# EAGLE board PCB (EAGLE 9.7.0)
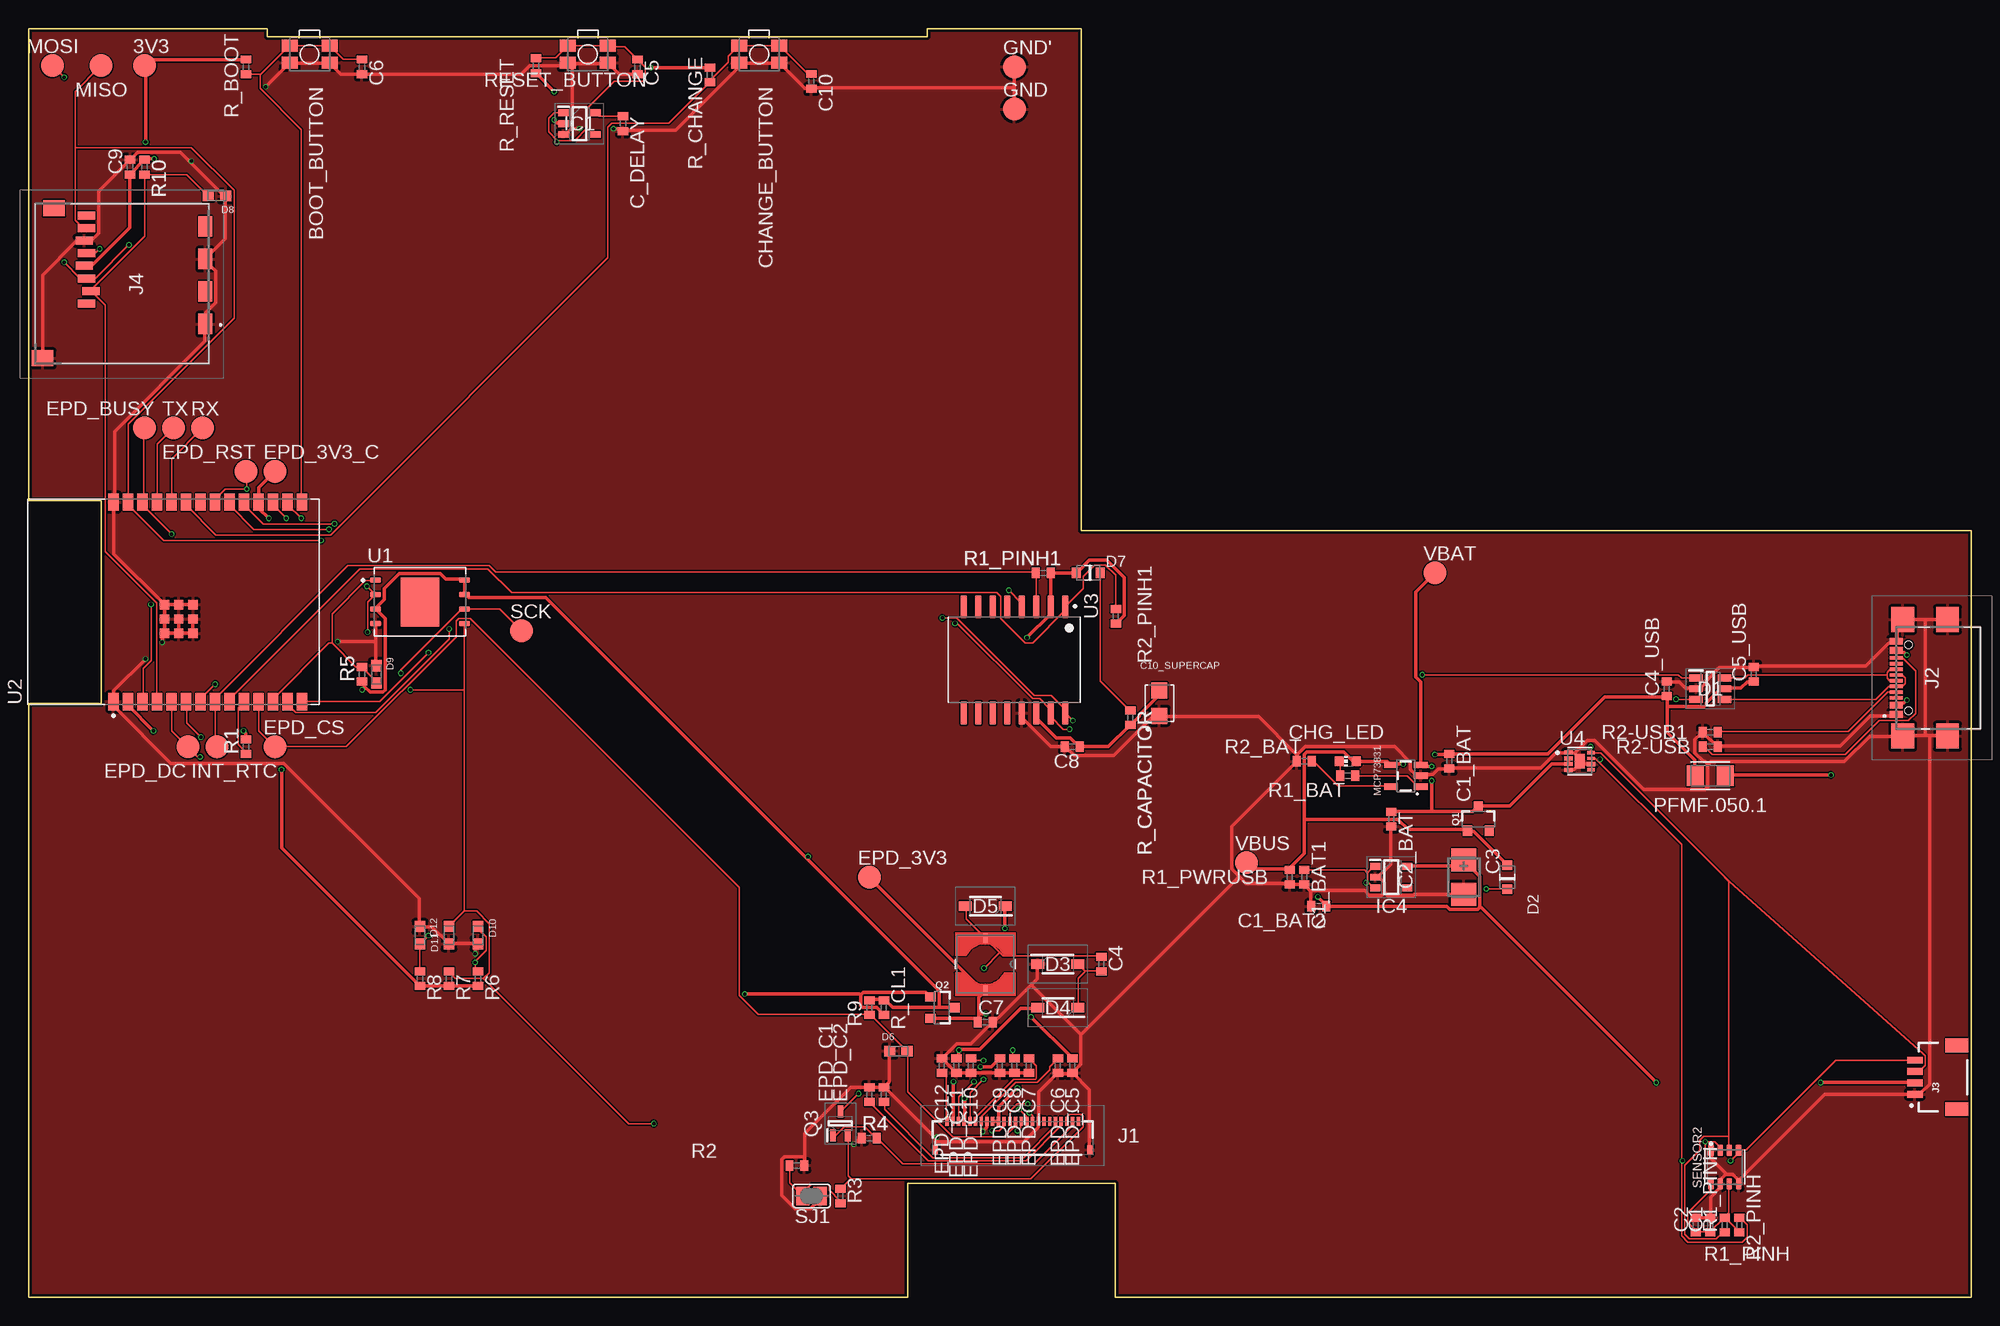
[diagram p0: board, top side]
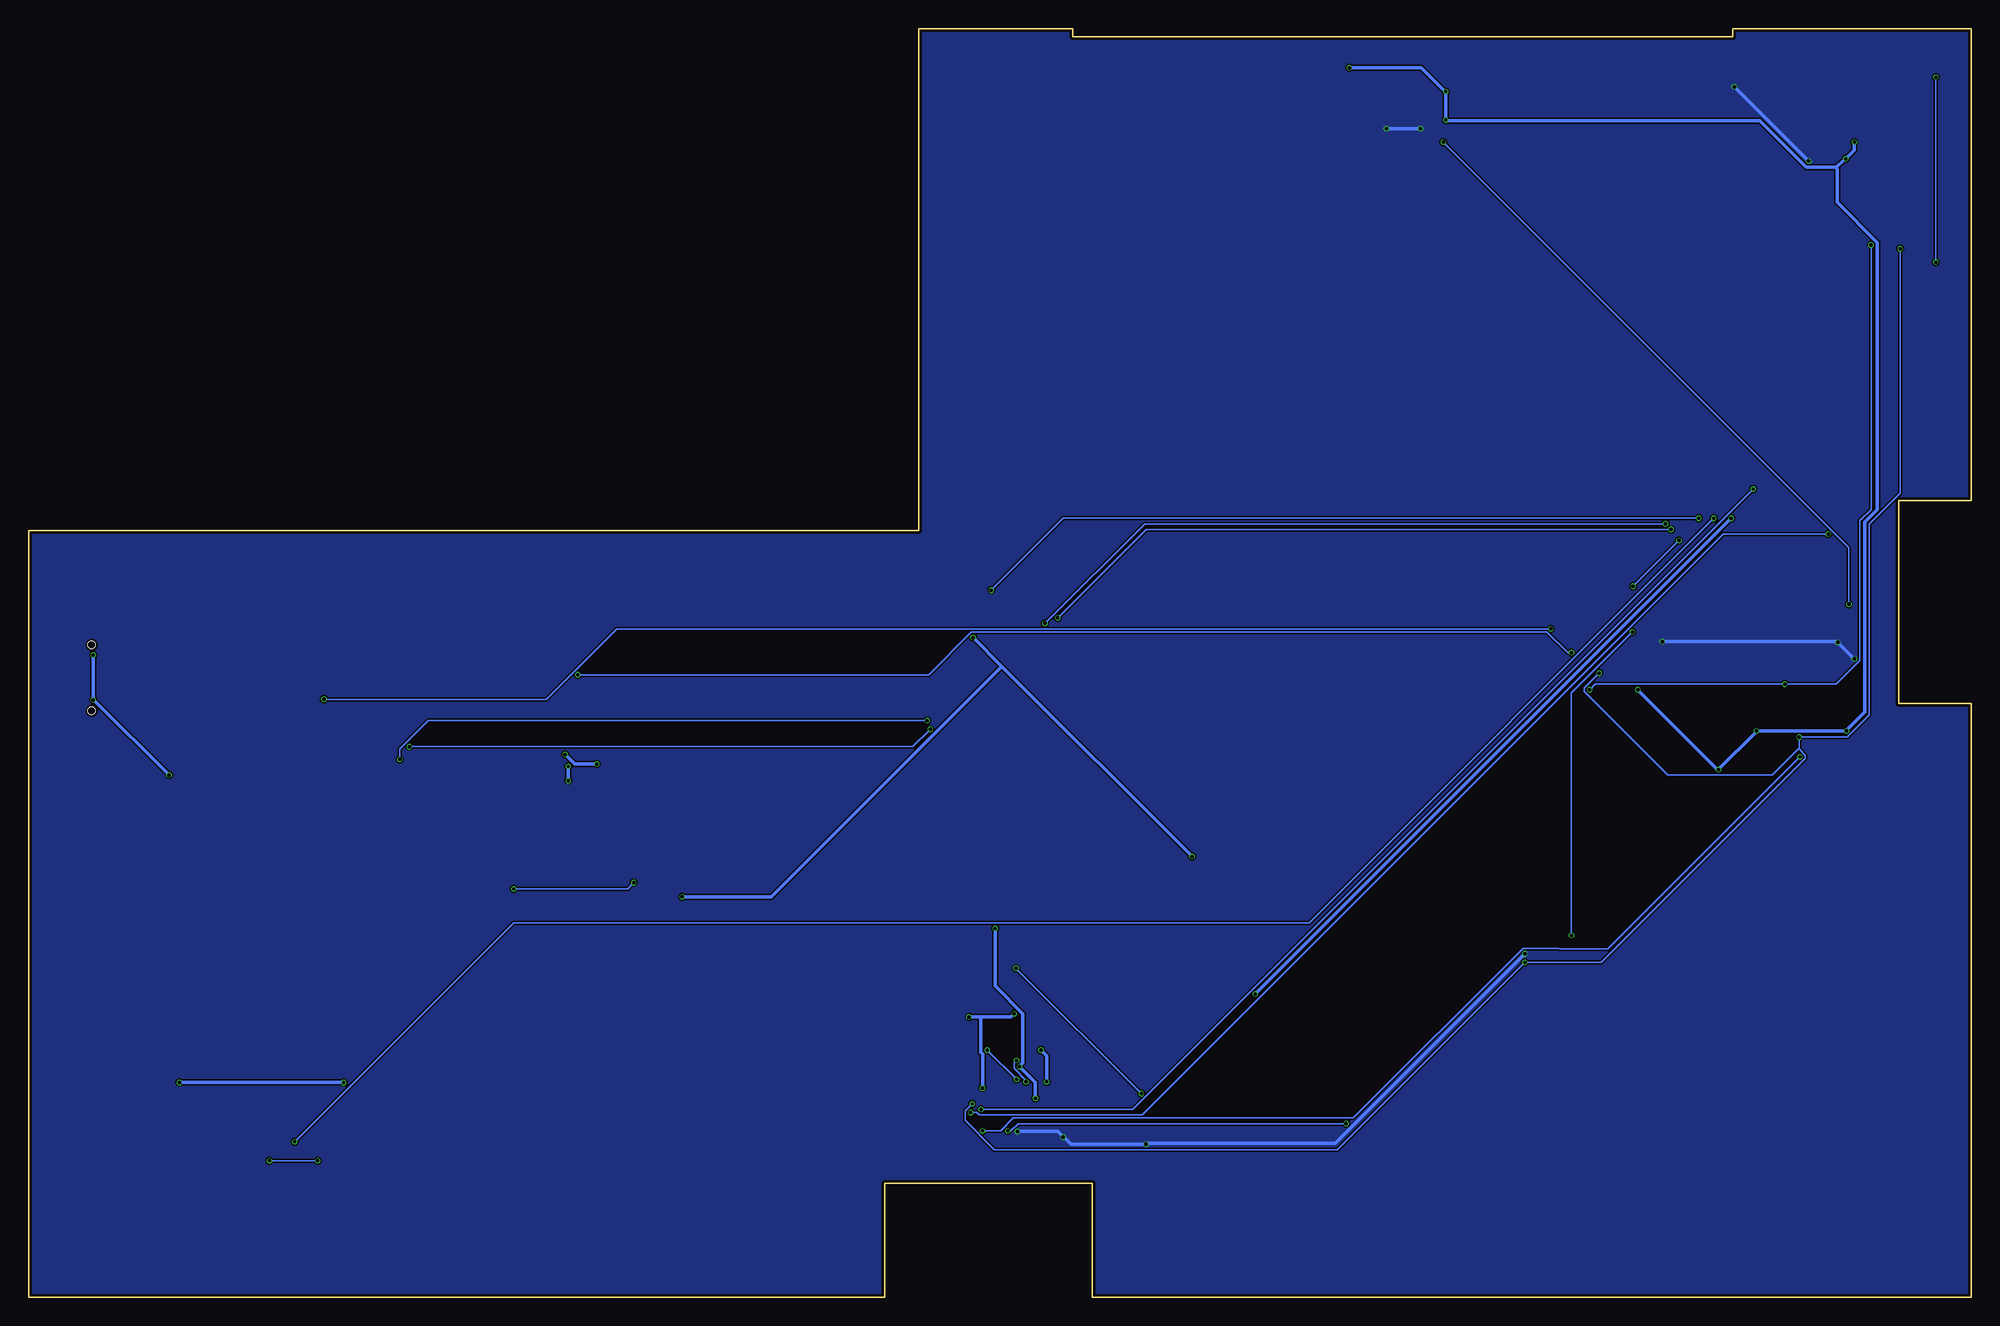
[diagram p1: board, bottom side, seen from below]

Size 170.2 x 111.2 mm. Coordinates in mm from the lower left corner, seen from the top.
Outline: 0,111.2 20.91,111.2 20.91,110.49 78.74,110.49 78.74,111.2 92.2,111.2 92.2,67.2 170.2,67.2 170.2,0 95.2,0 95.2,10 77,10 77,0 0,0 0,52.07 6.35,52.07 6.35,69.85 0,69.85 0,111.2
Copper layers (1*16): Top 0.035mm / dielectric 1.6mm / Bottom 0.035mm
Design rules "jlcpcb-2layers": minimum track width 0.15mm, minimum drill 0.3mm, track to track 5mil, track to pad 5mil, pad to pad 5mil, via to via 5mil, smd to smd 5mil, copper to edge 0.2mm, drill to drill 6mil, minimum pad ring 10mil, minimum via ring 3mil, stop-mask expansion 4mil, vias tented up to drill 0mil, thermal gap 10mil
Net classes: 1 POWER: width 0.3 mm

## Footprints (pad centres in the part's own frame; a part is rotated, then mirrored left to right if it is on the bottom)
TP20R = smd 2 x 2: TP 0,0
MYBUTTON = smd 1.4 x 1.05: 1 1.75,0.75; 2 -1.75,0.75; 3 -1.75,-0.75; 4 1.75,-0.75
EAGLE-LTSPICE_C0402 = smd 0.7 x 0.9: 1 -0.65,0; 2 0.65,0
RCL_CT3528 = smd 2 x 2.2: + -1.5,0; - 1.5,0
CAPCP3225X100N = smd 1.4 x 1.4: 1 -1.1,0; 2 1.1,0
ADAFRUIT_CHIP-LED0603 = smd 0.8 x 0.8: A 0,-0.75; C 0,0.75
SOT95P280X145-6N = smd 1.2 x 0.6: 1 -1.25,0.95; 2 -1.25,0; 3 -1.25,-0.95; 4 1.25,-0.95; 5 1.25,0; 6 1.25,0.95
ESP32_WROVER_AVX---SD0805S020S1R0_AVX_SD0805S020S1R0_0 = smd 0.8 x 0.9: 1 -1.05,0; 2 1.05,0
SOD3716X135N = smd 1.15 x 0.8: 1 -1.75,0; 2 1.75,0
DIOC1608X36N = smd 0.97 x 0.94: 1 -0.75,0; 2 0.75,0
SOT95P280X125-5N = smd 0.9 x 0.6: 1 -1.4,0.95; 2 -1.4,0; 3 -1.4,-0.95; 4 1.4,-0.95; 5 1.4,0.95
SOT95P280X120-5N = smd 0.9 x 0.6: 1 -1.4,0.95; 2 -1.4,0; 3 -1.4,-0.95; 4 1.4,-0.95; 5 1.4,0.95
FH34SRJ24S05SH99 = smd 0.3 x 0.8: 1 5.75,1.45; 2 5.25,1.45; 3 4.75,1.45; 4 4.25,1.45; 5 3.75,1.45; 6 3.25,1.45; 7 2.75,1.45; 8 2.25,1.45; 9 1.75,1.45; 10 1.25,1.45; 11 0.75,1.45; 12 0.25,1.45; 13 -0.25,1.45; 14 -0.75,1.45; 15 -1.25,1.45; 16 -1.75,1.45; 17 -2.25,1.45; 18 -2.75,1.45; 19 -3.25,1.45; 20 -3.75,1.45; 21 -4.25,1.45; 22 -4.75,1.45; 23 -5.25,1.45; 24 -5.75,1.45 | smd 0.4 x 0.8: MP1 6.75,-1.05; MP2 -6.75,-1.05
SAMACSYS_PARTS_USB4110GFA = smd 0.3 x 1.15: A1 -3.35,3.678; A4 -2.55,3.678; A5 -1.25,3.678; A6 -0.25,3.678; A7 0.25,3.678; A8 1.25,3.678; A9 2.55,3.678; A12 3.35,3.678; B1 3.05,3.678; B4 2.25,3.678; B5 1.75,3.678; B6 0.75,3.678; B7 -0.75,3.678; B8 -1.75,3.678; B9 -2.25,3.678; B12 -3.05,3.678 | smd 2.18 x 2: MP1 -5.11,-0.827; MP2 5.11,-0.827; MP3 -5.11,3.103; MP4 5.11,3.103 | hole 0.65: -2.89,2.603; 2.89,2.603
JST04_1MM_RA = smd 0.6 x 1.35: 1 -1.5,0; 2 -0.5,0; 3 0.5,0; 4 1.5,0 | smd 1.2 x 2: NC1 2.8,-3.675; NC2 -2.8,-3.675
112ATAARR03ATTEND = smd 1.8 x 1.2: G1 10.6,10.4; G2 4.9,10.4; S1 7.75,10.4; S2 2.05,10.4 | smd 1.4 x 1.9: G3 13.6,-3.85; G4 0.45,-2.85 | smd 0.7 x 1.5: P1 8.8,0; P2 7.7,0.4; P3 6.6,0; P4 5.5,-0.2; P5 4.4,0; P6 3.3,-0.2; P7 2.2,0; P8 1.1,0
IND_4828-WE-TPC_WRE = smd 0.813 x 0.406: 1 -2.286,0; 2 2.286,0
ESP32_WROVER_SPARKFUN-IC-POWER_SOT23-5 = smd 0.55 x 1.2: 1 -0.95,-1.3; 2 0,-1.3; 3 0.95,-1.3; 4 0.95,1.3; 5 -0.95,1.3
VARC3216X102N = smd 1.505 x 1.815: 1 -1.305,0; 2 1.305,0
ESP32_WROVER_SPARKFUN-DISCRETESEMI_SOT23-3 = smd 0.8 x 0.9: 1 -0.95,-1; 2 0.95,-1; 3 0,1.1
SOT65P210X110-3N = smd 1.05 x 0.5: 1 -1.05,0.65; 2 -1.05,-0.65; 3 1.05,0
ESP32_WROVER_EAGLE-LTSPICE_R0402 = smd 0.7 x 0.9: 1 -0.65,0; 2 0.65,0
ESP32_WROVER_BME680_PSON80P300X300X100-8N = smd 1.016 x 0.5: 1 1.458,1.2; 2 1.458,0.4; 3 1.458,-0.4; 4 1.458,-1.2; 5 -1.458,-1.22; 6 -1.458,-0.4; 7 -1.458,0.4; 8 -1.458,1.2
SJ = smd 1.168 x 1.6: 1 -0.762,0; 2 0.762,0
SON127P600X800X80-9N = smd 0.94 x 0.44: 1 -3.895,1.905; 2 -3.895,0.635; 3 -3.895,-0.635; 4 -3.895,-1.905; 5 3.895,-1.905; 6 3.895,-0.635; 7 3.895,0.635; 8 3.895,1.905 | smd 3.4 x 4.3: 9 0,0
XCVR_ESP32-C6-WROOM-1-N8 = smd 1.5 x 0.9: 1 -8.75,5.26; 2 -8.75,3.99; 3 -8.75,2.72; 4 -8.75,1.45; 5 -8.75,0.18; 6 -8.75,-1.09; 7 -8.75,-2.36; 8 -8.75,-3.63; 9 -8.75,-4.9; 10 -8.75,-6.17; 11 -8.75,-7.44; 12 -8.75,-8.71; 13 -8.75,-9.98; 14 -8.75,-11.25; 15 8.75,-11.25; 16 8.75,-9.98; 17 8.75,-8.71; 18 8.75,-7.44; 19 8.75,-6.17; 20 8.75,-4.9; 21 8.75,-3.63; 22 8.75,-2.36; 23 8.75,-1.09; 24 8.75,0.18; 25 8.75,1.45; 26 8.75,2.72; 27 8.75,3.99; 28 8.75,5.26 | smd 0.8 x 0.8: 29_1 -2.755,0.79; 29_2 -1.505,0.79; 29_3 -0.255,0.79; 29_4 -2.755,-0.46; 29_5 -1.505,-0.46; 29_6 -0.255,-0.46; 29_7 -2.755,-1.71; 29_8 -1.505,-1.71; 29_9 -0.255,-1.71
SOIC127P1032X265-16N = smd 2.05 x 0.59: 1 -4.655,4.445; 2 -4.655,3.175; 3 -4.655,1.905; 4 -4.655,0.635; 5 -4.655,-0.635; 6 -4.655,-1.905; 7 -4.655,-3.175; 8 -4.655,-4.445; 9 4.655,-4.445; 10 4.655,-3.175; 11 4.655,-1.905; 12 4.655,-0.635; 13 4.655,0.635; 14 4.655,1.905; 15 4.655,3.175; 16 4.655,4.445
SON50P200X200X80-9N = smd 0.813 x 0.356: 1 -0.985,0.75; 2 -0.985,0.25; 3 -0.985,-0.25; 4 -0.985,-0.75 | smd 0.76 x 0.27: 5 0.985,-0.75; 7 0.985,0.25; 8 0.985,0.75 | smd 0.813 x 0.381: 6 0.985,-0.25 | smd 0.9 x 1.3: 9 0,0

## Placement (x,y rotation side)
3V3  TPTP20R  [TP20R]  10.16,107.95 0 top
BOOT_BUTTON  BUTTON_CUSYOMV1PACKAGE  [MYBUTTON]  24.62,108.94 180 top
C1  100nF  [EAGLE-LTSPICE_C0402]  147.32,6.35 90 top
C1_BAT  4.7uF  [EAGLE-LTSPICE_C0402]  124.46,46.99 270 top
C1_BAT1  4.7uF  [EAGLE-LTSPICE_C0402]  111.76,36.83 270 top
C1_BAT2  4.7uF  [EAGLE-LTSPICE_C0402]  113.03,34.29 180 top
C2  100nF  [EAGLE-LTSPICE_C0402]  146.05,6.35 90 top
C2_BAT  4.7uF  [EAGLE-LTSPICE_C0402]  119.38,41.91 270 top
C3  100uF  [RCL_CT3528]  125.73,36.83 270 top
C4  4.7uF/25V  [EAGLE-LTSPICE_C0402]  93.98,29.21 90 top
C4_USB  100 nF  [EAGLE-LTSPICE_C0402]  143.51,53.34 90 top
C5  1uF  [EAGLE-LTSPICE_C0402]  53.34,107.84 270 top
C5_USB  4.7 uF  [EAGLE-LTSPICE_C0402]  151.13,54.61 90 top
C6  100nF  [EAGLE-LTSPICE_C0402]  29.21,107.84 270 top
C7  10uF  [EAGLE-LTSPICE_C0402]  83.82,24.13 0 top
C8  100nF  [EAGLE-LTSPICE_C0402]  91.44,48.26 180 top
C9  100nF  [EAGLE-LTSPICE_C0402]  8.89,99.06 90 top
C10  100nF  [EAGLE-LTSPICE_C0402]  68.58,106.57 270 top
C10_SUPERCAP  CPH3225A  [CAPCP3225X100N]  99.06,52.07 90 top
C_DELAY  100nF  [EAGLE-LTSPICE_C0402]  52.07,102.87 270 top
CHANGE_BUTTON  BUTTON_CUSYOMV1PACKAGE  [MYBUTTON]  64,108.94 180 top
CHG_LED  [ADAFRUIT_CHIP-LED0603]  115.57,46.99 90 top
D1  USBLC6-2SC6Y  [SOT95P280X145-6N]  147.32,53.34 0 top
D2  ESP32_WROVER_AVX---SD0805S020S1R0_AVX_SD0805S020S1R0_0_0AVX_SD0805S020S1R0_0_0  [ESP32_WROVER_AVX---SD0805S020S1R0_AVX_SD0805S020S1R0_0]  129.54,36.83 90 top
D3  MBR0530  [SOD3716X135N]  90.17,29.21 0 top
D4  MBR0530  [SOD3716X135N]  90.17,25.4 180 top
D5  MBR0530  [SOD3716X135N]  83.82,34.29 180 top
D6  PGB1010603MR  [DIOC1608X36N]  76.2,21.59 0 top
D7  ESP32_WROVER_AVX---SD0805S020S1R0_AVX_SD0805S020S1R0_0_0AVX_SD0805S020S1R0_0_0  [ESP32_WROVER_AVX---SD0805S020S1R0_AVX_SD0805S020S1R0_0]  92.82,63.5 180 top
D8  PGB1010603MR  [DIOC1608X36N]  16.51,96.52 180 top
D9  PGB1010603MR  [DIOC1608X36N]  30.48,54.61 270 top
D10  PGB1010603MR  [DIOC1608X36N]  39.37,31.75 90 top
D11  PGB1010603MR  [DIOC1608X36N]  36.83,31.75 90 top
D12  PGB1010603MR  [DIOC1608X36N]  34.29,31.75 270 top
EPD_3V3  TPTP20R  [TP20R]  73.66,36.83 0 top
EPD_3V3_C  TPTP20R  [TP20R]  21.59,72.39 0 top
EPD_BUSY  TPTP20R  [TP20R]  10.16,76.2 0 top
EPD_C1  1uF/50V  [EAGLE-LTSPICE_C0402]  73.66,17.78 90 top
EPD_C2  1uF/50V  [EAGLE-LTSPICE_C0402]  74.93,17.78 90 top
EPD_C5  0.1uF/50V  [EAGLE-LTSPICE_C0402]  91.44,20.32 270 top
EPD_C6  1uF/50V  [EAGLE-LTSPICE_C0402]  90.17,20.32 270 top
EPD_C7  1uf/50V  [EAGLE-LTSPICE_C0402]  87.63,20.32 270 top
EPD_C8  1uF/50V  [EAGLE-LTSPICE_C0402]  86.36,20.32 270 top
EPD_C9  1uF/50V  [EAGLE-LTSPICE_C0402]  85.09,20.32 270 top
EPD_C10  1uF/50V  [EAGLE-LTSPICE_C0402]  82.55,20.32 270 top
EPD_C11  1uF/50V  [EAGLE-LTSPICE_C0402]  81.28,20.32 270 top
EPD_C12  1uF/50V  [EAGLE-LTSPICE_C0402]  80.01,20.32 90 top
EPD_CS  TPTP20R  [TP20R]  21.59,48.26 0 top
EPD_DC  TPTP20R  [TP20R]  13.97,48.26 0 top
EPD_RST  TPTP20R  [TP20R]  19.05,72.39 0 top
GND  TPTP20R  [TP20R]  86.36,104.14 0 top
GND'  TPTP20R  [TP20R]  86.36,107.84 0 top
IC1  BD5229G-TR  [SOT95P280X125-5N]  48.26,102.87 0 top
IC4  XC6220A331MR-G  [SOT95P280X120-5N]  119.38,36.83 0 top
INT_RTC  TPTP20R  [TP20R]  16.51,48.26 0 top
J1  FH34SRJ-24S-0.5SH_99_  [FH34SRJ24S05SH99]  86.21,13.97 0 top
J2  SAMACSYS_PARTS_USB4110-GF-A  [SAMACSYS_PARTS_USB4110GFA]  167.28,54.3 90 top
J3  QWIIC_RIGHT_ANGLE  [JST04_1MM_RA]  165.25,19.3 90 top
J4  112A-TAAR-R03_ATTEND  [112ATAARR03ATTEND]  5.08,95.9 270 top
L1  744043680IND_4828-WE-TPC_WRE  [IND_4828-WE-TPC_WRE]  83.82,29.21 270 top
MCP73831  ESP32_WROVER_SPARKFUN-IC-POWER_MCP73831  [ESP32_WROVER_SPARKFUN-IC-POWER_SOT23-5]  120.65,45.72 90 top
MISO  TPTP20R  [TP20R]  6.35,107.95 0 top
MOSI  TPTP20R  [TP20R]  2.09,107.95 0 top
PFMF.050.1  [VARC3216X102N]  147.32,45.72 0 top
Q1  20V/4.2A/52mΩ/1.4W  [ESP32_WROVER_SPARKFUN-DISCRETESEMI_SOT23-3]  127,41.91 0 top
Q2  20V/4.2A/52mΩ/1.4W  [ESP32_WROVER_SPARKFUN-DISCRETESEMI_SOT23-3]  80.01,25.4 270 top
Q3  SI1308EDL-T1-GE3  [SOT65P210X110-3N]  71.12,15.24 90 top
R1  10K  [ESP32_WROVER_EAGLE-LTSPICE_R0402]  19.05,48.26 90 top
R1_BAT  200  [ESP32_WROVER_EAGLE-LTSPICE_R0402]  115.57,45.72 0 top
R1_PINH  10K  [ESP32_WROVER_EAGLE-LTSPICE_R0402]  148.59,6.35 90 top
R1_PINH1  10K  [ESP32_WROVER_EAGLE-LTSPICE_R0402]  88.9,63.5 0 top
R1_PWRUSB  100K  [ESP32_WROVER_EAGLE-LTSPICE_R0402]  110.49,36.83 90 top
R2  2.2  [ESP32_WROVER_EAGLE-LTSPICE_R0402]  67.31,11.56 180 top
R2-USB  5k1  [ESP32_WROVER_EAGLE-LTSPICE_R0402]  147.32,48.26 0 top
R2-USB1  5k1  [ESP32_WROVER_EAGLE-LTSPICE_R0402]  147.32,49.53 0 top
R2_BAT  2K  [ESP32_WROVER_EAGLE-LTSPICE_R0402]  111.76,46.99 0 top
R2_PINH  10K  [ESP32_WROVER_EAGLE-LTSPICE_R0402]  149.86,6.35 270 top
R2_PINH1  10K  [ESP32_WROVER_EAGLE-LTSPICE_R0402]  95.25,59.69 270 top
R3  0.47  [ESP32_WROVER_EAGLE-LTSPICE_R0402]  71.12,8.89 90 top
R4  10K  [ESP32_WROVER_EAGLE-LTSPICE_R0402]  73.66,13.97 0 top
R5  10K  [ESP32_WROVER_EAGLE-LTSPICE_R0402]  29.21,54.61 90 top
R6  10K  [ESP32_WROVER_EAGLE-LTSPICE_R0402]  39.37,27.94 90 top
R7  10K  [ESP32_WROVER_EAGLE-LTSPICE_R0402]  36.83,27.94 90 top
R8  10K  [ESP32_WROVER_EAGLE-LTSPICE_R0402]  34.29,27.94 90 top
R9  10K  [ESP32_WROVER_EAGLE-LTSPICE_R0402]  73.66,25.4 270 top
R10  10K  [ESP32_WROVER_EAGLE-LTSPICE_R0402]  10.16,99.06 270 top
R_BOOT  10K  [ESP32_WROVER_EAGLE-LTSPICE_R0402]  19.05,107.84 90 top
R_CAPACITOR  15  [ESP32_WROVER_EAGLE-LTSPICE_R0402]  96.52,50.8 270 top
R_CHANGE  10K  [ESP32_WROVER_EAGLE-LTSPICE_R0402]  59.69,107.13 90 top
R_CL1  10K  [ESP32_WROVER_EAGLE-LTSPICE_R0402]  74.93,25.4 90 top
R_RESET  10K  [ESP32_WROVER_EAGLE-LTSPICE_R0402]  44.45,107.94 270 top
RESET_BUTTON  BUTTON_CUSYOMV1PACKAGE  [MYBUTTON]  49,108.94 180 top
RX  TPTP20R  [TP20R]  15.24,76.2 0 top
SCK  TPTP20R  [TP20R]  43.18,58.42 0 top
SENSOR2  ESP32_WROVER_BME680_BME680  [ESP32_WROVER_BME680_PSON80P300X300X100-8N]  148.59,11.43 90 top
SJ1  [SJ]  68.58,8.89 180 top
TX  TPTP20R  [TP20R]  12.7,76.2 0 top
U1  W25Q512JVEIQ  [SON127P600X800X80-9N]  34.29,60.96 0 top
U2  ESP32-C6-WROOM-1-N8  [XCVR_ESP32-C6-WROOM-1-N8]  12.7,60.96 90 top
U3  DS3231SN#  [SOIC127P1032X265-16N]  86.36,55.88 270 top
U4  MAX17048G+T10  [SON50P200X200X80-9N]  135.89,46.99 0 top
VBAT  TPTP20R  [TP20R]  123.19,63.5 0 top
VBUS  TPTP20R  [TP20R]  106.68,38.1 0 top

## Library data of the parts
3V3 BOOT_BUTTON CHANGE_BUTTON CHG_LED EPD_3V3 EPD_3V3_C EPD_BUSY EPD_CS EPD_DC EPD_RST GND GND' INT_RTC MISO MOSI RESET_BUTTON RX SCK SJ1 TX VBAT VBUS = DeskAssistant v19 v1
C1 C1_BAT C1_BAT1 C1_BAT2 C2 C2_BAT C4 C4_USB C5 C5_USB C6-C10 C_DELAY EPD_C1 EPD_C2 EPD_C5-EPD_C12 = DeskAssistant v19 v1; SPICEMODEL: NONE; SPICEPREFIX: C
C3 = DeskAssistant v19 v1; SPICEPREFIX: C
C10_SUPERCAP = DeskAssistant v19 v1; AVAILABILITY: Not in stock; CHECK_PRICES: https://www.snapeda.com/parts/CPH3225A/Seiko+Instruments/view-part/?ref=eda; DESCRIPTION: 11 mF (EDLC) Supercapacitor 3.3 V 1210 (3225 Metric) - -; MF: Seiko Instruments; MP: CPH3225A; PACKAGE: 1210 Seiko; PRICE: None; PURCHASE-URL: https://www.snapeda.com/api/url_track_click_mouser/?unipart_id=562593&manufacturer=Seiko Instruments&part_name=CPH3225A&search_term=None; SNAPEDA_LINK: https://www.snapeda.com/parts/CPH3225A/Seiko+Instruments/view-part/?ref=snap
D1 = DeskAssistant v19 v1; AVAILABILITY: In Stock; CHECK_PRICES: https://www.snapeda.com/parts/USBLC6-2SC6Y/STMicroelectronics/view-part/?ref=eda; DESCRIPTION: 17V Clamp 5A (8/20µs) Ipp Tvs Diode Surface Mount SOT-23-6; MF: STMicroelectronics; MP: USBLC6-2SC6Y; PACKAGE: SOT-23-6 STMicroelectronics; PRICE: None; SNAPEDA_LINK: https://www.snapeda.com/parts/USBLC6-2SC6Y/STMicroelectronics/view-part/?ref=snap
D2 D7 = DeskAssistant v19 v1; CENTROID_NOT_SPECIFIED: No; DATASHEET: http://datasheets.avx.com/schottky.pdf; DIGIKEY_DESCRIPTION: DIODE SCHOTTKY 20V 1A 0805; DIGIKEY_PART_NUMBER: 478-7800-1-ND; LEAD_FREE: yes; MF: AVX; MOUSER_PART_NUMBER: 581-SD0805S020S1R0; PACKAGE: 0805 (2012 metric); PREFIX: D; ROHS: yes; TEMPERATURE_RANGE_HIGH: +125°C; TEMPERATURE_RANGE_LOW: -55°C
D3-D5 = DeskAssistant v19 v1; AVAILABILITY: In Stock; CHECK_PRICES: https://www.snapeda.com/parts/MBR0530/Onsemi/view-part/?ref=eda; DESCRIPTION: Diode Schottky 30 V 500mA Surface Mount SOD-123; MF: ON Semiconductor; MP: MBR0530; PACKAGE: SOD-123-2 ON Semiconductor; PRICE: None; PURCHASE-URL: https://www.snapeda.com/api/url_track_click_mouser/?unipart_id=179458&manufacturer=ON Semiconductor&part_name=MBR0530&search_term=None; SNAPEDA_LINK: https://www.snapeda.com/parts/MBR0530/Onsemi/view-part/?ref=snap
D6 D8-D12 = DeskAssistant v19 v1; AVAILABILITY: In Stock; CHECK_PRICES: https://www.snapeda.com/parts/PGB1010603MR/Littelfuse/view-part/?ref=eda; DESCRIPTION: 150V (Typ) Clamp - Ipp Tvs Diode Surface Mount 0603 (1608 Metric); MF: Littelfuse Inc.; MP: PGB1010603MR; PACKAGE: 0603 Littelfuse Inc.; PRICE: None; PURCHASE-URL: https://www.snapeda.com/api/url_track_click_mouser/?unipart_id=5659453&manufacturer=Littelfuse Inc.&part_name=PGB1010603MR&search_term=None; SNAPEDA_LINK: https://www.snapeda.com/parts/PGB1010603MR/Littelfuse/view-part/?ref=snap
IC1 = DeskAssistant v19 v1; DESCRIPTION: Voltage Detector with Adjustable Delay Time: CMOS processes are utilized to develop high precision, low current consumption CMOS reset ICs that allow arbitrary setting of the delay time. The extensive lineup includes both Nch Open Drain and CMOS output types in a wide range of detection voltages (from 2.3V to 6.0V, in 0.1V steps), enabling selection of the ideal solution based on customer requirements. In addition, the entire series is of course both lead-free and RoHS-compliant.; HEIGHT: 1.25mm; MANUFACTURER_NAME: ROHM Semiconductor; MANUFACTURER_PART_NUMBER: BD5229G-TR; MOUSER_PART_NUMBER: 755-BD5229G-TR; MOUSER_PRICE-STOCK: https://www.mouser.co.uk/ProductDetail/ROHM-Semiconductor/BD5229G-TR?qs=4kLU8WoGk0vvnhrrYwdszw%3D%3D
IC4 = DeskAssistant v19 v1; DESCRIPTION: LDO Voltage Regulators; HEIGHT: 1.2mm; MANUFACTURER_NAME: Torex; MANUFACTURER_PART_NUMBER: XC6220A331MR-G; MOUSER_PART_NUMBER: 865-XC6220A331MR-G; MOUSER_PRICE-STOCK: https://www.mouser.co.uk/ProductDetail/Torex-Semiconductor/XC6220A331MR-G?qs=AsjdqWjXhJ8ZSWznL1J0gg%3D%3D
J1 = DeskAssistant v19 v1; DESCRIPTION: 24 Position FFC, FPC Connector Contacts, Top and Bottom 0.020" (0.50mm) Surface Mount, Right Angle; HEIGHT: 1.1mm; MANUFACTURER_NAME: Hirose; MANUFACTURER_PART_NUMBER: FH34SRJ-24S-0.5SH(99); MOUSER_PART_NUMBER: 798-FH34SRJ24S05SH99; MOUSER_PRICE-STOCK: https://www.mouser.co.uk/ProductDetail/Hirose-Connector/FH34SRJ-24S-0.5SH99?qs=vcbW%252B4%252BSTIpKBl5ap9J8Fw%3D%3D
J2 = DeskAssistant v19 v1; DESCRIPTION: CONN USB 2.0 TYPE-C R/A SMT; HEIGHT: 3.26mm; MANUFACTURER_NAME: GCT (GLOBAL CONNECTOR TECHNOLOGY); MANUFACTURER_PART_NUMBER: USB4110-GF-A; MOUSER_PART_NUMBER: 640-USB4110-GF-A; MOUSER_PRICE-STOCK: https://www.mouser.co.uk/ProductDetail/GCT/USB4110-GF-A?qs=KUoIvG%2F9IlYiZvIXQjyJeA%3D%3D
J3 = DeskAssistant v19 v1; PROD_ID: CONN-13694
J4 = DeskAssistant v19 v1; DESCRIPTION: Micro SD Card Socket, Push-Push Type, Top Mount, SMT, H=1.83mm, 10u; HEIGHT: 1.9mm; MANUFACTURER_NAME: ATTEND; MANUFACTURER_PART_NUMBER: 112A-TAAR-R03 ATTEND
L1 = DeskAssistant v19 v1; COPYRIGHT: Copyright (C) 2024 Ultra Librarian. All rights reserved.; MANUFACTURER_PART_NUMBER: 744043680; MFR_NAME: Wurth Electronics
MCP73831 = DeskAssistant v19 v1; PROD_ID: IC-09995
PFMF.050.1 = Circuit-Protection; CATEGORY: Circuit-Protection; PACKAGE_SIZE: 1206; PACKAGE_TYPE: SMD; SUBCATEGORY: Varistor
Q1 Q2 = DeskAssistant v19 v1; PROD_ID: TRAN-14388
Q3 = DeskAssistant v19 v1; AVAILABILITY: In Stock; CHECK_PRICES: https://www.snapeda.com/parts/SI1308EDL-T1-GE3/Vishay+Siliconix/view-part/?ref=eda; DESCRIPTION: Si1308EDL-T1-GE3 N-channel MOSFET Transistor, 1.5 A, 30 V, 3-Pin SC-70 | Siliconix / Vishay SI1308EDL-T1-GE3; MF: Vishay Siliconix; MP: SI1308EDL-T1-GE3; PACKAGE: SOT-323 Vishay Semiconductor; PRICE: None; PURCHASE-URL: https://www.snapeda.com/api/url_track_click_mouser/?unipart_id=274603&manufacturer=Vishay Siliconix&part_name=SI1308EDL-T1-GE3&search_term=None; SNAPEDA_LINK: https://www.snapeda.com/parts/SI1308EDL-T1-GE3/Vishay+Siliconix/view-part/?ref=snap
R1 R1_BAT R1_PINH R1_PINH1 R1_PWRUSB R2 R2-USB R2-USB1 R2_BAT R2_PINH R2_PINH1 R3-R10 R_BOOT R_CAPACITOR R_CHANGE R_CL1 R_RESET = DeskAssistant v19 v1; SPICEMODEL: NONE; SPICEPREFIX: R
SENSOR2 = DeskAssistant v19 v1; AVAILABILITY: Unavailable; DESCRIPTION: Integrated Environmental Unit; MF: Bosch Sensortec; MP: BME680; PACKAGE: LGA-8 Bosch Tools; PRICE: None
U1 = DeskAssistant v19 v1; AVAILABILITY: In Stock; CHECK_PRICES: https://www.snapeda.com/parts/W25Q512JVEIQ/Winbond+Electronics/view-part/?ref=eda; DESCRIPTION: FLASH - NOR Memory IC 512Mb (64M x 8) SPI - Quad I/O 133 MHz 8-WSON (8x6); MF: Winbond Electronics; MP: W25Q512JVEIQ; PACKAGE: Package; PRICE: None; SNAPEDA_LINK: https://www.snapeda.com/parts/W25Q512JVEIQ/Winbond+Electronics/view-part/?ref=snap
U2 = DeskAssistant v19 v1; AVAILABILITY: In Stock; CHECK_PRICES: https://www.snapeda.com/parts/ESP32-C6-WROOM-1-N8/Espressif+Systems/view-part/?ref=eda; DESCRIPTION: Multiprotocol Modules ESP32-C6 module, Wi-Fi 6 in 2.4 GHz band, Bluetooth 5, Zigbee 3.0 and Thread. ESP34-WROOM Compatible - ENGINEERING SAMPLE; MF: Espressif Systems; MP: ESP32-C6-WROOM-1-N8; PACKAGE: None; PRICE: None; SNAPEDA_LINK: https://www.snapeda.com/parts/ESP32-C6-WROOM-1-N8/Espressif+Systems/view-part/?ref=snap
U3 = DeskAssistant v19 v1; AVAILABILITY: In Stock; CHECK_PRICES: https://www.snapeda.com/parts/DS3231SN%23/Analog+Devices/view-part/?ref=eda; DESCRIPTION: Extremely Accurate I²C-Integrated RTC/TCXO/Crystal; MF: Analog Devices; MP: DS3231SN#; PACKAGE: SOIC-16 Maxim; PRICE: None; PURCHASE-URL: https://www.snapeda.com/api/url_track_click_mouser/?unipart_id=99048&manufacturer=Analog Devices&part_name=DS3231SN#&search_term=None; SNAPEDA_LINK: https://www.snapeda.com/parts/DS3231SN%23/Analog+Devices/view-part/?ref=snap
U4 = DeskAssistant v19 v1; AVAILABILITY: In Stock; CHECK_PRICES: https://www.snapeda.com/parts/MAX17048G+T10/Analog+Devices/view-part/?ref=eda; DESCRIPTION: 3µA 1-Cell/2-Cell Fuel Gauge with ModelGauge; MF: Analog Devices; MP: MAX17048G+T10; PACKAGE: TDFN-8 Maxim; PRICE: None; PURCHASE-URL: https://www.snapeda.com/api/url_track_click_mouser/?unipart_id=329239&manufacturer=Analog Devices&part_name=MAX17048G+T10&search_term=None; SNAPEDA_LINK: https://www.snapeda.com/parts/MAX17048G+T10/Analog+Devices/view-part/?ref=snap

## Nets
3V3 [POWER]: 3V3.TP C1_BAT2.1 C3.+ C9.1 D7.2 IC1.2 IC4.5 J3.2 J4.P4 Q2.3 R1.2 R1_PINH1.2 R2_PINH1.2 R5.1 R6.1 R7.1 R8.1 R9.1 R10.1 R_BOOT.2 R_CHANGE.2 R_CL1.2 R_RESET.2 U1.3 U1.7 U1.8 U2.2 U3.2
32KHZ: R2_PINH1.1 U2.9 U3.1
DN: D1.4 J2.A7 J2.B7
DP: D1.6 J2.A6 J2.B6
EPD_3V3 [POWER]: C7.1 EPD_3V3.TP EPD_C5.1 J1.15 J1.16 L1.2 Q2.2
EPD_3V3_C [POWER]: EPD_3V3_C.TP Q2.1 R_CL1.1 U2.18
EPD_BUSY: EPD_BUSY.TP J1.9 U2.26
EPD_CS: D6.2 EPD_CS.TP J1.12 R9.2 U2.11
EPD_DC: EPD_DC.TP J1.11 U2.5
EPD_RST: EPD_RST.TP J1.10 U2.21
FLASH_CS: D9.2 R5.2 U1.1 U2.12
GDR: J1.2 Q3.1 R4.2
GND [POWER]: BOOT_BUTTON.1 BOOT_BUTTON.2 C1.2 C1_BAT1.2 C1_BAT2.2 C1_BAT.2 C2.2 C2_BAT.2 C3.- C4_USB.2 C5.2 C5_USB.2 C6.2 C7.2 C8.2 C9.2 C10.2 C10_SUPERCAP.1 C_DELAY.2 CHANGE_BUTTON.1 CHANGE_BUTTON.2 D1.2 D3.1 D6.1 D8.1 D9.1 D10.1 D11.1 D12.1 EPD_C1.2 EPD_C2.2 EPD_C5.2 EPD_C6.2 EPD_C7.2 EPD_C8.2 EPD_C9.2 EPD_C10.2 EPD_C11.2 EPD_C12.2 GND'.TP GND.TP IC1.3 IC4.2 J1.8 J1.17 J1.MP1 J1.MP2 J2.A1 J2.A12 J2.B1 J2.B12 J2.MP1 J2.MP2 J2.MP3 J2.MP4 J3.1 J4.G1 J4.G2 J4.G3 J4.P6 MCP73831.2 R1_PWRUSB.1 R2-USB1.1 R2-USB.2 R2.1 R2_BAT.1 R4.1 RESET_BUTTON.1 RESET_BUTTON.2 SENSOR2.1 SENSOR2.5 SENSOR2.7 SJ1.1 U1.4 U2.1 U2.28 U2.29_1 U2.29_2 U2.29_3 U2.29_4 U2.29_5 U2.29_6 U2.29_7 U2.29_8 U2.29_9 U3.13 U4.1 U4.4 U4.6 U4.9
GPIO8: R1.1 U2.10
I2C_PW: C1.1 C2.1 R1_PINH.2 R2_PINH.2 SENSOR2.2 SENSOR2.6 SENSOR2.8 U2.17
INT_RTC: INT_RTC.TP R1_PINH1.1 U2.8 U3.3
IO/BOOT: BOOT_BUTTON.3 BOOT_BUTTON.4 C6.1 R_BOOT.1 U2.15
IO/CHANGE: C10.1 CHANGE_BUTTON.3 CHANGE_BUTTON.4 R_CHANGE.1 U2.23
MISO: D12.2 J4.P7 MISO.TP R8.2 U1.2 U2.27
MOSI: D11.2 J1.14 J4.P3 MOSI.TP R7.2 U1.5 U2.7
N$1: J2.A5 R2-USB1.2
N$2: J2.B5 R2-USB.1
N$3: MCP73831.5 R2_BAT.2
N$5: C1_BAT1.1 D2.1 IC4.1 IC4.3
N$6: EPD_C12.1 J1.24
N$7: EPD_C6.1 J1.18
N$8: MCP73831.1 R1_BAT.2
N$9: CHG_LED.C R1_BAT.1
N$10: C4.1 D3.2 D4.1
N$11: EPD_C7.1 J1.19
N$12: EPD_C8.1 J1.20
N$13: D7.1 R_CAPACITOR.1
N$14: EPD_C10.1 J1.22
N$18: C_DELAY.1 IC1.5
N$23: EPD_C1.1 J1.4
N$24: EPD_C2.1 J1.5
PREVGH [POWER]: D5.1 EPD_C9.1 J1.21
PREVGL [POWER]: D4.2 EPD_C11.1 J1.23
RESE: J1.3 Q3.2 R3.2
RESE': R2.2 R3.1 SJ1.2
RESET: C5.1 IC1.1 R_RESET.1 RESET_BUTTON.3 RESET_BUTTON.4 U2.3
RTC_RST: U2.16 U3.4
RX: RX.TP U2.24
SCK: D10.2 J1.13 J4.P5 R6.2 SCK.TP U1.6 U2.6
SCL: J3.4 R2_PINH.1 SENSOR2.4 U2.20 U3.16 U4.7
SDA: J3.3 R1_PINH.1 SENSOR2.3 U2.19 U3.15 U4.8
SRC: C4.2 D5.2 L1.1 Q3.3
SS_SD: D8.2 J4.P2 R10.2 U2.4
TX: TX.TP U2.25
USB_D+: D1.1 U2.14
USB_D-: D1.3 U2.13
VBAT [POWER]: C2_BAT.1 MCP73831.3 Q1.3 U4.2 U4.3 VBAT.TP
VBUS [POWER]: C1_BAT.1 C4_USB.1 C5_USB.1 CHG_LED.A D1.5 D2.2 MCP73831.4 PFMF.050.1.1 Q1.1 R1_PWRUSB.2 VBUS.TP
VRTC [POWER]: C8.1 C10_SUPERCAP.2 R_CAPACITOR.2 U3.14
VUSB [POWER]: J2.A4 J2.A9 J2.B4 J2.B9 PFMF.050.1.2

## Tracks (layer width: path | path; a pad name or v marks a point on that pad's centre or on a via)
3V3  (via drill 0.3)
  Top 0.3: v46.05,103.18 46.33,102.91 46.81,102.91 IC1.2 | v46.05,105.67 44.46,107.27 R_RESET.2 | v54.5,107.75 59.62,107.75 R_CHANGE.2 | R_BOOT.2 19.04,108.44 10.66,108.44 10.18,107.96 3V3.TP 10.25,107.82 v10.25,101.24 | J4.P4 4.92,90.44 5.54,90.44 8.86,93.76 8.86,98.27 C9.1 8.93,98.47 10.11,99.65 R10.1 10.25,99.79 v11.01,99.79 | 127.14,34.21 126.94,34 124.51,34 124.23,34.28 113.71,34.28 C1_BAT2.1 113.64,34.42 v112.95,35.11 | 127.14,34.21 127.14,36.91 125.76,38.3 C3.+ 125.62,38.23 125.2,37.81 120.84,37.81 IC4.5 | v156.99,18.84 165.23,18.84 J3.2 | v142.59,18.84 127.28,34.14 127.14,34.21 | R6.1 39.33,27.29 36.98,27.29 R7.1 36.77,27.29 34.35,27.29 R8.1 34.21,27.35 22.16,39.4 v22.16,46.26 | v18.84,49.65 19.04,49.44 19.04,48.96 R1.2 | v10.94,49.65 8.73,51.87 8.73,52.15 U2.2 | R2_PINH1.2 95.29,59.07 95.98,59.76 95.98,63.09 94.46,64.61 92.93,64.61 91.89,63.57 D7.2 91.76,63.5 89.61,63.5 R1_PINH1.2 89.54,63.36 89.54,60.59 U3.2 89.54,60.39 89.54,59.9 v87.46,57.82 | R9.1 73.68,26.11 74.93,26.11 R_CL1.2 75.07,26.04 75.69,25.41 79.78,25.41 | 79.78,25.41 81.09,25.41 Q2.3 | 29.47,53.5 29.92,53.05 31.02,53.05 31.23,53.25 31.23,59.49 30.4,60.32 U1.3 30.47,60.45 31.16,61.15 31.16,62.12 32.48,63.43 36.08,63.43 36.56,62.95 38.09,62.95 U1.8 38.23,62.81 38.23,61.63 U1.7 38.36,61.56 38.57,61.35 45.29,61.35 68.11,38.54 | 29.47,53.5 29.22,53.74 29.22,53.95 R5.1 | 79.78,25.41 79.78,26.87 68.11,38.54 | v68.28,38.64 68.21,38.64 68.11,38.54 | 29.47,53.5 v29.22,53.25
  Bottom 0.3: v54.5,107.75 48.2,107.75 46.19,105.75 v46.05,105.67 v46.05,103.18 45.91,103.11 18.56,103.11 14.47,99.03 11.84,99.03 | v10.25,101.24 10.25,100.55 v11.01,99.79 11.15,99.72 11.84,99.03 | v142.59,18.84 v156.99,18.84 | v68.28,38.64 84.94,55.3 | 84.94,55.3 v87.46,57.82 | v29.22,53.25 22.3,46.33 v22.16,46.26 18.91,49.51 v18.84,49.65 v10.94,49.65 10.87,49.79 9.35,51.31 9.35,67.93 8.24,69.04 8.24,92.45 11.77,95.98 11.77,98.89 11.84,99.03 | v112.95,35.11 105.12,35.11 84.94,55.3
32KHZ
  Top 0.15: R2_PINH1.1 95.22,60.39 95.22,63.29 94.32,64.19 93.42,64.19 92.38,63.16 92.38,62.12 90.86,60.59 U3.1 90.79,60.52 90.79,60.18 87.95,57.34 87.32,57.34 85.18,59.49 85.18,61.42 84.83,61.77 42.31,61.77 40.23,63.85 29.02,63.85 17.66,52.49 17.66,52.22 U2.9
DN
  Top 0.15: J2.A7 163.64,54.5 164.19,54.5 164.4,54.29 164.4,53.81 164.19,53.6 163.64,53.6 J2.B7 163.57,53.53 162.94,53.53 161.84,52.42 148.61,52.42 D1.4
DP
  Top 0.15: 162.81,54.57 162.81,54.78 163.01,54.98 163.57,54.98 J2.B6 | 162.81,54.57 162.81,54.29 163.01,54.08 163.57,54.08 J2.A6 | 162.81,54.57 150.62,54.57 150.34,54.29 148.61,54.29 D1.6
EPD_3V3  (via drill 0.3)
  Top 0.3: J1.16 84.48,15.44 84.9,15.44 J1.15 84.97,15.58 84.97,16.69 v86.63,18.35 | 83.24,24.86 83.24,26.32 83.69,26.77 | 83.24,24.86 83.24,24.17 C7.1 83.1,24.45 Q2.2 | 83.69,26.77 83.79,26.87 L1.2 | v87.81,24.58 91.41,20.98 EPD_C5.1 | 83.24,24.86 v83.86,24.86 | 83.69,26.77 73.68,36.77 EPD_3V3.TP
  Bottom 0.3: 86.77,24.58 84.14,24.58 v83.86,24.86 | 86.77,24.58 v87.81,24.58 | v86.63,18.35 86.63,21.33 86.77,21.47 86.77,24.58
EPD_3V3_C  (via drill 0.3)
  Top 0.3: EPD_3V3_C.TP 21.54,72.37 20.15,70.98 20.15,69.73 U2.18 20.22,69.6 20.22,69.11 v21.05,68.28 | 72.92,26.52 72.92,25.55 73.06,25.41 74.31,25.41 74.93,24.79 R_CL1.1 | 72.92,26.52 73.13,26.73 78.6,26.73 78.94,26.38 Q2.1 | v62.74,26.59 72.78,26.59 72.92,26.52
  Bottom 0.3: v62.74,26.59 v21.05,68.28
EPD_BUSY  (via drill 0.3)
  Top 0.15: v87.67,16.2 87.95,15.93 87.95,15.44 J1.9 | v12.53,66.89 10.04,69.39 10.04,69.67 U2.26 10.11,69.67 10.11,76.17 EPD_BUSY.TP
  Bottom 0.15: v87.67,16.2 87.12,16.2 86.91,16 72.64,16 21.74,66.89 v12.53,66.89
EPD_CS
  Top 0.15: U2.11 20.15,52.15 20.15,49.65 21.54,48.27 EPD_CS.TP 21.61,48.27 27.84,48.27 37.46,57.89 37.46,59.28 37.67,59.49 38.71,59.49 62.26,35.94 62.26,26.45 63.92,24.79 73.61,24.79 R9.2 73.68,24.72 73.82,24.72 76.94,21.61 D6.2 77.01,21.54 77.01,18 80.95,14.06 85.45,14.06 86.42,15.03 86.42,15.37 J1.12
EPD_DC  (via drill 0.3)
  Top 0.15: v86.63,14.61 86.91,14.89 86.91,15.37 J1.11 | v15.03,47.37 14.82,47.37 13.99,48.2 EPD_DC.TP 13.92,48.27 12.53,49.65 12.53,52.15 U2.5
  Bottom 0.15: v86.63,14.61 85.04,14.61 83.93,15.72 54.15,15.72 39.27,30.61 36.15,30.61 36.08,30.54 31.86,30.54 v15.03,47.37
EPD_RST  (via drill 0.3)
  Top 0.15: v86.77,16.48 87.39,15.86 87.39,15.44 J1.10 | EPD_RST.TP 19.11,72.37 v19.11,70.84 17.24,70.84 16.34,69.94 16.34,69.73 U2.21
  Bottom 0.15: v86.77,16.48 73.47,16.48 v19.11,70.84
FLASH_CS
  Top 0.15: D9.2 30.54,53.88 29.22,55.19 R5.2 29.15,55.26 28.67,55.26 26.59,57.34 | 26.59,57.34 26.59,59.9 29.5,62.81 30.33,62.81 U1.1 | 26.59,57.34 26.32,57.34 21.47,52.49 21.47,52.22 U2.12
GDR
  Top 0.15: J1.2 91.41,15.37 91.41,15.03 88.09,11.7 76.59,11.7 74.37,13.92 R4.2 74.24,13.99 73.27,14.96 71.47,14.96 70.7,14.2 70.5,14.2 Q3.1
GND  (via drill 0.3)
  Top 0.3: C2.2 146.12,6.99 147.29,6.99 C1.2 147.36,7.13 147.36,8.79 148.13,9.56 148.13,9.83 SENSOR2.7 148.19,10.32 148.68,10.8 | 148.68,10.8 149.3,10.8 149.79,10.32 149.79,9.97 SENSOR2.5 149.93,10.39 157.34,17.8 165.23,17.8 J3.1 165.37,17.87 165.72,17.87 166.55,18.7 166.55,49.24 | SENSOR2.1 147.43,12.88 147.43,12.12 148.61,10.94 148.68,10.8 | C4_USB.2 143.56,53.95 144.59,53.95 145.15,53.39 146.05,53.39 D1.2 146.19,53.46 146.53,53.46 146.95,53.88 146.95,54.02 148.13,55.19 151.1,55.19 C5_USB.2 151.24,55.33 160.94,55.33 162.94,57.34 163.5,57.34 J2.B1 163.64,57.41 163.64,57.62 J2.A12 163.71,57.76 163.71,58.93 164.12,59.35 J2.MP4 164.26,59.42 166.13,59.42 | 166.55,49.24 168.07,49.24 J2.MP1 | 166.55,49.24 166.13,49.24 | 166.13,49.24 164.19,49.24 J2.MP3 164.05,49.17 161.28,49.17 159.07,46.95 147.36,46.95 147.23,46.81 147.09,46.74 | 166.13,59.42 168.07,59.42 J2.MP2 | 166.13,59.42 166.13,49.24 | J1.MP1 92.93,12.95 92.93,18.21 91.48,19.67 EPD_C5.2 | EPD_C5.2 91.34,19.6 90.3,19.6 EPD_C6.2 88.5,18 88.5,15.44 J1.8 88.43,15.3 88.43,14.89 87.19,13.64 79.43,13.64 | EPD_C7.2 87.6,19.67 86.49,19.67 EPD_C8.2 85.11,19.67 EPD_C9.2 84.97,19.67 82.68,19.67 EPD_C10.2 81.3,19.67 EPD_C11.2 81.23,19.74 80.05,20.91 EPD_C12.2 80.12,21.05 81.3,22.23 82.55,22.23 84.42,24.1 C7.2 84.55,24.1 87.84,27.39 | 87.84,27.39 88.36,27.91 88.36,29.15 D3.1 | 92.17,23.06 92.17,20.43 91.55,19.8 EPD_C5.2 | 87.84,27.39 92.17,23.06 | 68,12.33 68,14.4 72.02,18.42 73.61,18.42 EPD_C1.2 73.75,18.42 74.79,18.42 EPD_C2.2 | 68,12.33 68,11.56 R2.1 | 68,12.33 66.2,12.33 66,12.12 66,8.93 67.17,7.76 68.49,7.76 69.32,8.59 69.32,8.86 SJ1.1
  Top 0.3: 79.43,13.99 79.43,13.64 | 79.43,13.64 79.43,12.95 J1.MP2 | 79.43,13.99 75,18.42 EPD_C2.2 | v83.58,14.54 83.93,14.89 83.93,15.37 J1.17 | v79.57,14.06 79.43,13.99 | v72.3,13.43 72.78,13.92 72.99,13.92 R4.1 | D6.1 75.41,21.54 75.41,18.91 75.07,18.56 EPD_C2.2 | 112.32,35.59 112.32,34.35 C1_BAT2.2 | 112.32,35.59 111.84,36.08 C1_BAT1.2 111.7,36.22 110.52,36.22 R1_PWRUSB.1 110.39,36.29 106.64,36.29 106.06,36.88 | C2_BAT.2 119.32,41.2 119.32,37.95 118.21,36.84 118,36.84 IC4.2 118.35,36.77 118.76,36.36 118.76,35.46 | 118.76,35.46 118.56,35.25 117.45,35.25 117.03,35.66 112.46,35.66 112.32,35.59 | C3.- 125.69,35.32 121.39,35.32 121.33,35.25 119.04,35.25 118.9,35.39 118.76,35.46 | J2.B12 163.64,51.24 163.64,50.97 J2.A1 163.5,50.97 161.35,50.97 158.72,48.34 148.06,48.34 R2-USB.2 147.92,48.27 146.67,49.51 R2-USB1.1 146.53,49.44 145.98,48.89 145.98,47.71 146.74,46.95 146.88,46.95 147.09,46.74 | U3.13 87.05,51.18 87.05,50.76 89.54,48.27 C8.2 90.92,48.2 91.62,47.51 95.08,47.51 98.54,50.97 99.03,50.97 C10_SUPERCAP.1 99.17,50.9 107.75,50.9 111.01,47.64 111.15,47.58 | U4.4 134.97,46.26 135.38,46.26 135.87,46.74 135.87,46.95 U4.9 | U4.6 136.84,46.74 136.01,46.74 U4.9 | 135.38,47.71 134.97,47.71 U4.1 134.76,47.71 133.79,47.71 132.47,46.4 124.58,46.4 C1_BAT.2 124.44,46.33 123.47,46.33 122.99,45.84 122.09,45.84 MCP73831.2 121.95,45.77 121.53,45.77 121.05,46.26 121.05,46.88 119.66,48.27 111.84,48.27 111.15,47.58 | 135.38,47.71 135.8,47.3 135.8,47.09 U4.9 | 111.15,47.58 111.15,47.02 R2_BAT.1 111.01,46.88 105.4,41.27 105.4,37.53 106.06,36.88 | 147.09,46.74 147.09,44.74 146.88,44.53 141.48,44.53 137.18,48.82 136.56,48.82 135.52,47.78 135.38,47.71
  Top 0.3: 106.06,36.88 92.31,23.13 92.17,23.06 | C5.2 53.32,107.2 51.73,107.2 50.76,108.17 RESET_BUTTON.2 50.62,108.1 47.99,108.1 47.78,107.89 RESET_BUTTON.1 | 47.64,102.49 47.09,101.94 46.88,101.94 IC1.3 | 47.64,102.49 47.64,107.82 47.3,108.17 RESET_BUTTON.1 | RESET_BUTTON.1 47.16,108.1 47.02,107.96 43.9,107.96 43.14,107.2 29.36,107.2 C6.2 29.15,107.2 27.35,107.2 26.38,108.17 BOOT_BUTTON.2 26.25,108.17 22.92,108.17 BOOT_BUTTON.1 22.78,108.1 v20.77,106.09 | 86.36,106.02 86.36,107.82 GND'.TP | 86.36,106.02 86.36,104.15 GND.TP | 86.36,106.02 68.7,106.02 C10.2 68.56,105.95 68,105.95 65.79,108.17 CHANGE_BUTTON.2 65.65,108.17 62.39,108.17 CHANGE_BUTTON.1 62.19,108.17 62.19,107.75 56.72,102.28 52.08,102.28 C_DELAY.2 52.01,102.42 v51.24,102.42 | v48.27,102.42 47.78,102.42 47.64,102.49 | J4.G3 1.25,82.34 1.25,89.61 4.16,92.52 4.78,92.52 J4.P6 4.92,92.66 5.54,92.66 6.16,93.28 6.16,96.95 8.86,99.65 C9.2 9,99.79 9.56,100.34 13.3,100.34 14.16,99.48 | 14.16,99.48 17.11,96.53 D8.1 17.24,96.47 17.24,92.8 15.51,91.06 J4.G2 15.51,90.86 16.41,89.96 16.41,87.19 15.51,86.28 15.51,85.32 J4.G1 15.44,85.18 15.44,83.79 7.55,75.9 7.55,69.8 U2.28 7.48,69.67 7.48,65.16 11.84,60.8 U2.29_3 | 30.4,57.48 30.4,55.47 30.47,55.4 D9.1 | 30.4,57.48 30.4,59 U1.4 | U2.29_1 11.91,58.24 11.91,59.42 U2.29_2 11.91,59.55 11.91,60.66 U2.29_3 | U2.29_4 13.16,58.24 12.05,58.24 U2.29_1 | U2.29_4 13.3,58.24 14.4,58.24 U2.29_7 14.4,58.38 14.4,59.42 U2.29_8 | U2.29_5 13.16,59.42 13.16,58.38 U2.29_4 | U2.29_3 12.05,60.73 13.16,60.73 U2.29_6 13.3,60.73 14.4,60.73 U2.29_9 | v10.25,55.95 7.48,53.18 7.48,52.22 U2.1 7.55,52.08 7.55,51.73 12.46,46.81 22.37,46.81 34.21,34.97 34.21,32.62 D12.1 34.35,32.48 35.32,32.48 36.7,31.09 D11.1 36.84,31.02 39.33,31.02 D10.1 39.13,30.89 v39.13,30.12
  Top 0.3: v11.7,57.41 11.7,57.96 11.84,58.1 U2.29_1 | v27.08,57.48 30.4,57.48 | v14.27,99.58 14.16,99.48
  Bottom 0.3: v83.58,14.54 80.05,14.54 v79.57,14.06 79.43,13.99 78.88,13.43 v72.3,13.43 72.16,13.5 55.75,13.5 v39.13,30.12 | v51.24,102.42 v48.27,102.42 | v10.25,55.95 v11.7,57.41 11.84,57.48 v27.08,57.48 | v14.27,99.58 v20.77,106.09
  pour Top: -32.94,-35.48 222.17,-35.48 222.17,120.57 -32.94,120.57
  pour Bottom: -32.94,-35.48 222.17,-35.48 222.17,120.57 -32.94,120.57
GPIO8
  Top 0.15: R1.1 19.04,47.64 19.04,47.78 18.35,48.48 18.35,51.66 18.84,52.15 U2.10
I2C_PW  (via drill 0.3)
  Top 0.15: R2_PINH.2 149.86,5.75 148.61,6.99 R1_PINH.2 | SENSOR2.6 148.96,9.97 148.96,7.41 148.61,7.06 R1_PINH.2 | 147.29,5.75 146.12,5.75 C2.1 146.12,5.82 145.36,6.58 145.36,7.41 147.36,9.42 147.36,9.97 SENSOR2.8 147.36,10.04 146.88,10.53 146.88,13.43 146.98,13.54 | 146.98,13.54 147.09,13.64 147.71,13.64 148.13,13.23 148.13,12.95 SENSOR2.2 | v22.58,68.28 21.47,69.39 21.47,69.67 U2.17 | 146.98,13.54 v146.88,13.64 | 147.29,5.75 148.54,6.99 R1_PINH.2 | 147.29,5.75 C1.1
  Bottom 0.15: v22.58,68.28 58.03,32.83 127.7,32.83 v146.88,13.64
INT_RTC
  Top 0.15: U3.3 88.29,60.59 88.29,63.43 R1_PINH1.1 88.22,63.57 40.93,63.57 40.37,64.13 27.98,64.13 16.34,52.49 16.34,52.28 U2.8 16.34,52.15 16.34,48.41 16.48,48.27 INT_RTC.TP
IO/BOOT
  Top 0.15: C6.1 29.15,108.52 27.56,108.52 26.38,109.69 BOOT_BUTTON.3 26.32,109.69 22.92,109.69 BOOT_BUTTON.4 22.85,109.69 20.36,107.2 20.29,107.2 | 20.29,107.2 19.11,107.2 R_BOOT.1 | 20.29,107.2 20.29,105.95 23.89,102.35 23.89,69.73 U2.15
IO/CHANGE
  Top 0.15: C10.1 68.56,107.27 68.21,107.27 65.79,109.69 CHANGE_BUTTON.3 65.72,109.69 62.33,109.69 CHANGE_BUTTON.4 62.19,109.69 61.29,108.79 61.29,108.24 59.69,106.64 59.69,106.51 R_CHANGE.1 59.62,106.44 56.09,102.91 51.11,102.91 50.76,102.56 50.76,91.13 26.45,66.83 16.41,66.83 13.85,69.39 13.85,69.67 U2.23
MISO  (via drill 0.3)
  Top 0.15: 4.09,100.76 4.09,105.67 6.3,107.89 MISO.TP | 4.09,100.76 4.09,94.39 4.71,93.76 5.05,93.76 J4.P7 | R8.2 34.28,30.95 D12.2 34.35,31.02 v35.04,31.72 | v29.64,62.33 30.33,61.63 U1.2 30.33,61.56 29.71,60.94 v29.71,58.31 | v25.62,66.34 11.84,66.34 8.73,69.46 8.73,69.67 U2.27 8.73,69.73 8.73,76.52 18,85.8 18,97.02 14.27,100.76 4.09,100.76
  Bottom 0.15: v25.62,66.34 v29.64,62.33 | v35.04,31.72 35.04,52.98 v29.71,58.31
MOSI  (via drill 0.3)
  Top 0.15: v84.42,14.61 85.04,14.61 85.45,15.03 85.45,15.37 J1.14 | v54.78,15.23 52.56,15.23 39.85,27.94 | 39.85,27.94 39.82,27.98 37.4,27.98 36.84,28.53 R7.2 | v3.12,90.72 4.5,89.33 5.05,89.33 J4.P3 5.12,89.33 5.89,89.33 v8.79,92.24 | v3.12,106.92 2.15,107.89 MOSI.TP | 38.16,33.86 38.16,53.25 | 38.16,53.25 38.16,59 U1.5 | 38.16,33.86 36.84,32.55 D11.2 | v16.34,53.74 15.1,52.49 15.1,52.22 U2.7 | 38.16,53.25 v33.45,53.25 | 39.85,27.94 40.37,28.46 40.37,32.76 39.27,33.86 38.16,33.86
  Bottom 0.15: v84.42,14.61 84.14,14.61 83.52,15.23 v54.78,15.23 | v3.12,106.92 v3.12,90.72 | v33.45,53.25 32.96,53.74 v16.34,53.74 11.84,53.74 9.76,55.82 9.76,68.07 8.79,69.04 v8.79,92.24
N$1
  Top 0.15: R2-USB1.2 147.99,49.58 159.41,49.58 162.88,53.05 163.57,53.05 J2.A5
N$2
  Top 0.15: R2-USB.1 146.67,48.2 146.88,48.2 147.5,47.58 159.14,47.58 162.11,50.55 164.68,50.55 165.3,51.18 165.3,54.91 164.19,56.02 163.64,56.02 J2.B5
N$3
  Top 0.15: R2_BAT.2 112.46,46.95 112.6,46.95 114.75,44.8 119.32,44.8 MCP73831.5
N$5  (via drill 0.3)
  Top 0.15: 117.31,36.42 117.79,35.94 117.93,35.94 IC4.3 | 117.31,37.26 117.31,36.42 | 117.31,37.26 117.79,37.74 117.93,37.74 IC4.1 | v127.7,35.8 129.5,35.8 D2.1 | v117.17,36.36 117.24,36.42 117.31,36.42 | C1_BAT1.1 111.77,37.46 117.03,37.46 117.24,37.26 117.31,37.26
  Bottom 0.15: v127.7,35.8 117.72,35.8 v117.17,36.36
N$6
  Top 0.15: J1.24 80.4,15.44 80.4,19.32 80.05,19.67 EPD_C12.1
N$7
  Top 0.15: J1.18 83.52,15.44 83.52,15.86 86.49,18.84 88.36,18.84 89.47,19.94 89.47,20.22 90.16,20.91 EPD_C6.1
N$8
  Top 0.15: R1_BAT.2 116.27,45.7 120.77,45.7 121.67,44.8 121.95,44.8 MCP73831.1
N$9
  Top 0.15: CHG_LED.C 114.89,46.95 114.89,45.77 R1_BAT.1
N$10
  Top 0.15: 92.52,28.6 93.97,28.6 C4.1 | 92.52,28.6 91.96,29.15 D3.2 | D4.1 91.96,25.41 91.96,27.98 92.52,28.53 92.52,28.6
N$11
  Top 0.15: J1.19 82.96,15.44 82.96,15.79 86.28,19.11 88.22,19.11 88.29,19.18 88.29,20.29 87.67,20.91 EPD_C7.1
N$12  (via drill 0.3)
  Top 0.15: v83.65,19.11 82.48,17.94 82.48,15.44 J1.20 | v86.22,21.68 86.22,21.12 86.36,20.98 EPD_C8.1
  Bottom 0.15: v86.22,21.68 v83.65,19.11
N$13
  Top 0.15: D7.1 93.9,63.43 93.9,54.02 96.47,51.45 R_CAPACITOR.1
N$14  (via drill 0.3)
  Top 0.15: v82.82,18.91 81.51,17.59 81.51,15.44 J1.22 | v83.65,20.77 82.75,20.77 82.61,20.91 EPD_C10.1
  Bottom 0.15: v82.82,18.91 82.82,19.04 83.86,20.08 83.86,20.57 v83.65,20.77
N$18
  Top 0.15: C_DELAY.1 52.01,103.53 50,103.53 49.72,103.81 IC1.5
N$23
  Top 0.15: J1.4 90.44,15.37 90.44,15.03 87.39,11.98 78.81,11.98 73.68,17.11 EPD_C1.1
N$24
  Top 0.15: J1.5 89.96,15.37 89.96,15.03 87.19,12.26 79.22,12.26 75,16.48 75,17.11 EPD_C2.1
PREVGH  (via drill 0.3)
  Top 0.3: v81.99,17.45 81.99,15.44 J1.21 | v83.38,20.22 84.35,20.22 85.04,20.91 EPD_C9.1 | v85.52,32.34 85.52,34.28 D5.1
  Bottom 0.3: v81.99,17.45 81.99,18.84 v83.38,20.22 83.31,20.36 83.1,20.57 83.1,24.86 85.52,27.29 v85.52,32.34
PREVGL  (via drill 0.3)
  Top 0.3: v81.02,18.91 81.02,15.44 J1.23 | EPD_C11.1 81.3,20.98 81.51,21.19 v81.51,21.68 81.65,21.74 83.31,21.74 86.91,25.35 88.36,25.35 D4.2
  Bottom 0.3: v81.02,18.91 81.02,21.19 v81.51,21.68
RESE
  Top 0.15: 72.02,10.39 87.81,10.39 92.38,14.96 92.38,15.86 92.17,16.07 91.2,16.07 91,15.86 91,15.44 J1.3 | 72.02,10.39 71.19,9.56 R3.2 | Q3.2 71.81,14.13 71.81,10.66 72.02,10.46 72.02,10.39
RESE'
  Top 0.15: R2.2 66.69,11.49 66.69,10.04 67.8,8.93 SJ1.2 67.73,9.07 68.56,9.9 70.01,9.9 70.15,9.76 70.15,9.42 71.12,8.45 R3.1
RESET  (via drill 0.3)
  Top 0.15: R_RESET.1 44.46,108.65 46.19,108.65 47.23,109.69 RESET_BUTTON.4 47.3,109.69 50.69,109.69 RESET_BUTTON.3 50.76,109.62 52.22,109.62 53.32,108.52 C5.1 53.39,108.44 54.02,107.82 54.02,106.71 53.88,106.58 51.31,106.58 48.96,104.22 48.96,102.49 47.85,101.38 46.33,101.38 | 46.33,101.38 45.57,102.14 45.57,103.32 46.05,103.81 46.81,103.81 IC1.1 | v10.73,60.73 10.73,55.82 10.04,55.12 10.04,52.22 U2.3 | v46.26,101.24 46.33,101.31 46.33,101.38
  Bottom 0.15: v10.73,60.73 10.73,65.72 v46.26,101.24
RTC_RST  (via drill 0.3)
  Top 0.15: v23.89,68.28 22.71,69.46 22.71,69.67 U2.16 | v85.87,61.98 86.98,60.87 86.98,60.59 U3.4
  Bottom 0.15: v23.89,68.28 79.57,68.28 v85.87,61.98
RX
  Top 0.15: U2.24 12.53,69.73 12.53,73.47 15.23,76.17 RX.TP
SCK  (via drill 0.3)
  Top 0.15: SCK.TP 43.14,58.45 41.27,60.32 38.23,60.32 U1.6 38.16,60.32 37.95,60.32 32.62,54.98 v32.62,54.71 | v87.53,16.97 86.63,16.97 86.01,16.34 86.01,15.44 J1.13 | R6.2 39.33,28.6 39.13,28.81 v39.13,29.36 39.13,29.43 40.1,30.4 40.1,31.58 39.4,32.27 39.4,32.48 D10.2 | v15.1,49.1 13.85,50.34 13.85,52.15 U2.6 | v6.23,91.89 5.89,91.55 5.12,91.55 J4.P5
  Bottom 0.15: v87.53,16.97 88.16,16.34 88.16,15.51 85.59,12.95 55.54,12.95 v39.13,29.36 32.41,29.36 14.54,47.23 14.54,47.51 15.1,48.06 | 15.1,48.06 v15.1,49.1 10.87,49.1 8.93,51.04 8.93,67.8 6.23,70.5 v6.23,91.89 | v32.62,54.71 33.93,53.39 33.93,53.12 26.59,45.77 17.45,45.77 15.17,48.06 15.1,48.06
SCL  (via drill 0.3)
  Top 0.15: J3.4 165.23,20.77 158.31,20.77 150.48,12.95 149.86,12.95 SENSOR2.4 149.72,12.88 149.72,12.6 v149.09,11.98 | 137.5,46.99 144.8,39.68 144.8,11.98 | 137.5,46.99 137.25,47.23 136.91,47.23 U4.7 | 144.8,11.98 144.8,5.4 145.36,4.85 150.13,4.85 150.55,5.26 150.55,6.37 149.93,6.99 R2_PINH.1 | v144.87,11.98 144.8,11.98 | v26.32,67.31 19.74,67.31 17.66,69.39 17.66,69.67 U2.20 | v80.05,59.55 81.3,59.55 88.09,52.77 89.61,52.77 90.79,51.59 90.79,51.24 U3.16 90.86,51.18 v91.48,50.55 | v137.67,47.16 137.5,46.99
  Bottom 0.15: v144.87,11.98 v149.09,11.98 | v26.32,67.31 72.3,67.31 v80.05,59.55 | v137.67,47.16 137.67,48.06 135.18,50.55 v91.48,50.55
SDA  (via drill 0.3)
  Top 0.15: 148.96,14.13 148.96,12.95 SENSOR2.3 | 148.96,36.46 148.96,36.49 137.74,47.71 136.91,47.71 U4.8 136.84,47.78 v136.84,48.27 | 148.96,14.13 146.74,14.13 146.39,13.78 146.39,12.88 145.08,11.56 145.08,5.54 145.49,5.12 147.85,5.12 148.4,5.68 148.54,5.68 R1_PINH.1 | 148.96,14.13 148.96,36.46 | 148.96,36.46 148.59,36.83 165.99,21.33 166.13,21.19 166.13,20.36 165.58,19.8 165.3,19.8 J3.3 | v26.8,67.8 20.57,67.8 18.91,69.46 18.91,69.67 U2.19 | v81.16,59.07 81.37,59.07 87.95,52.49 88.57,52.49 89.47,51.59 89.47,51.24 U3.15 89.54,51.18 89.54,50.9 90.65,49.79 v91.2,49.79
  Bottom 0.15: v26.8,67.8 72.44,67.8 v81.16,59.07 | v136.84,48.27 92.73,48.27 v91.2,49.79
SRC  (via drill 0.3)
  Top 0.15: 85.07,30.23 83.86,31.44 L1.1 83.79,31.51 82.13,33.17 82.13,34.28 D5.2 | 85.07,30.23 85.39,29.92 93.97,29.92 C4.2 | v72.71,17.87 71.19,16.34 Q3.3 | 85.07,30.23 v83.7,28.85
  Bottom 0.15: v83.7,28.85 v72.71,17.87
SS_SD
  Top 0.15: D8.2 15.72,96.53 13.85,98.4 10.18,98.4 R10.2 10.18,98.33 10.18,93 5.54,88.36 5.54,88.22 J4.P2 5.54,88.16 6.72,86.98 6.72,65.37 11.22,60.87 11.22,52.22 U2.4
TX
  Top 0.15: U2.25 11.29,69.73 11.29,74.79 12.67,76.17 TX.TP
USB_D+  (via drill 0.3)
  Top 0.15: v122.09,54.57 144.53,54.57 144.8,54.29 146.05,54.29 D1.1 | v35.04,56.51 30.75,52.22 U2.14
  Bottom 0.15: v122.09,54.57 91.34,54.57 87.6,58.31 37.19,58.31 35.39,56.51 v35.04,56.51
USB_D-  (via drill 0.3)
  Top 0.15: v144.32,52.42 146.05,52.42 D1.3 | v36.84,58.59 36.84,57.69 30.4,51.24 23.41,51.24 22.71,51.94 22.71,52.15 U2.13
  Bottom 0.15: v144.32,52.42 124.86,52.42 118.69,58.59 v36.84,58.59
VBAT  (via drill 0.3)
  Top 0.3: U4.2 134.9,47.23 U4.3 134.76,46.74 133.44,46.74 129.77,43.07 127.14,43.07 Q1.3 126.94,43 126.52,42.59 122.92,42.59 | 122.92,42.59 119.39,42.59 C2_BAT.1 | VBAT.TP 123.13,63.43 121.53,61.84 121.53,54.36 121.95,53.95 MCP73831.3 122.02,46.54 v122.92,46.54 | v122.92,45.29 122.92,42.59
  Bottom 0.3: v122.92,46.54 v122.92,45.29
VBUS  (via drill 0.3)
  Top 0.3: D2.2 129.5,37.95 126.59,40.86 126.1,40.86 Q1.1 125.97,41 120.84,41 119.94,41.9 111.77,41.9 | VBUS.TP 106.71,38.09 107.27,37.53 110.45,37.53 R1_PWRUSB.2 110.52,37.67 111.77,38.92 111.77,41.9 | 111.77,41.9 111.77,47.58 111.98,47.78 115.23,47.78 115.92,47.09 116.2,47.09 CHG_LED.A 116.34,46.95 119.04,46.95 119.32,46.67 MCP73831.4 119.46,46.74 v120.43,46.74 | C5_USB.1 151.1,53.95 150.55,53.95 150,53.39 148.61,53.39 D1.5 148.47,53.25 148.13,53.25 146.95,52.08 146.95,51.94 146.81,51.8 143.56,51.8 | 143.56,51.8 143.56,52.49 C4_USB.1 143.49,52.63 138.08,52.63 133.1,47.64 124.51,47.64 C1_BAT.1 124.37,47.58 v123.2,47.58 | 143.56,51.8 143.56,49.51 145.98,47.09 145.98,45.77 PFMF.050.1.1
  Bottom 0.3: v120.43,46.74 122.36,46.74 v123.2,47.58
VRTC
  Top 0.3: C10_SUPERCAP.2 99.03,53.12 99.03,52.77 97.3,51.04 97.3,50.9 96.6,50.21 R_CAPACITOR.2 96.47,50.14 94.6,48.27 92.1,48.27 C8.1 91.96,48.34 91.27,49.03 90.03,49.03 88.29,50.76 88.29,51.18 U3.14
VUSB  (via drill 0.3)
  Top 0.3: J2.A4 163.64,51.8 163.64,52.01 J2.B9 163.78,52.08 164.26,52.08 v164.54,52.35 | J2.A9 163.64,56.78 163.64,56.58 J2.B4 163.78,56.51 164.33,56.51 v164.54,56.3 | v157.89,45.77 148.68,45.77 PFMF.050.1.2
  Bottom 0.3: v164.54,56.3 v164.54,52.35 164.4,52.28 v157.89,45.77